# Altium PCB waffling60-SE.PcbDoc (part 1 of 2)
Units mm, origin at the board's own origin, x right, y up, seen from the top; angles counter-clockwise.
Board outline 283.9 x 96.45 mm, 2 copper layers (Component Side, Bottom Layer), stack 1.571 mm thick; 161 components, 102 nets, 768 pads, 77 vias.
Unrouted connection lines stored in the file: 5.
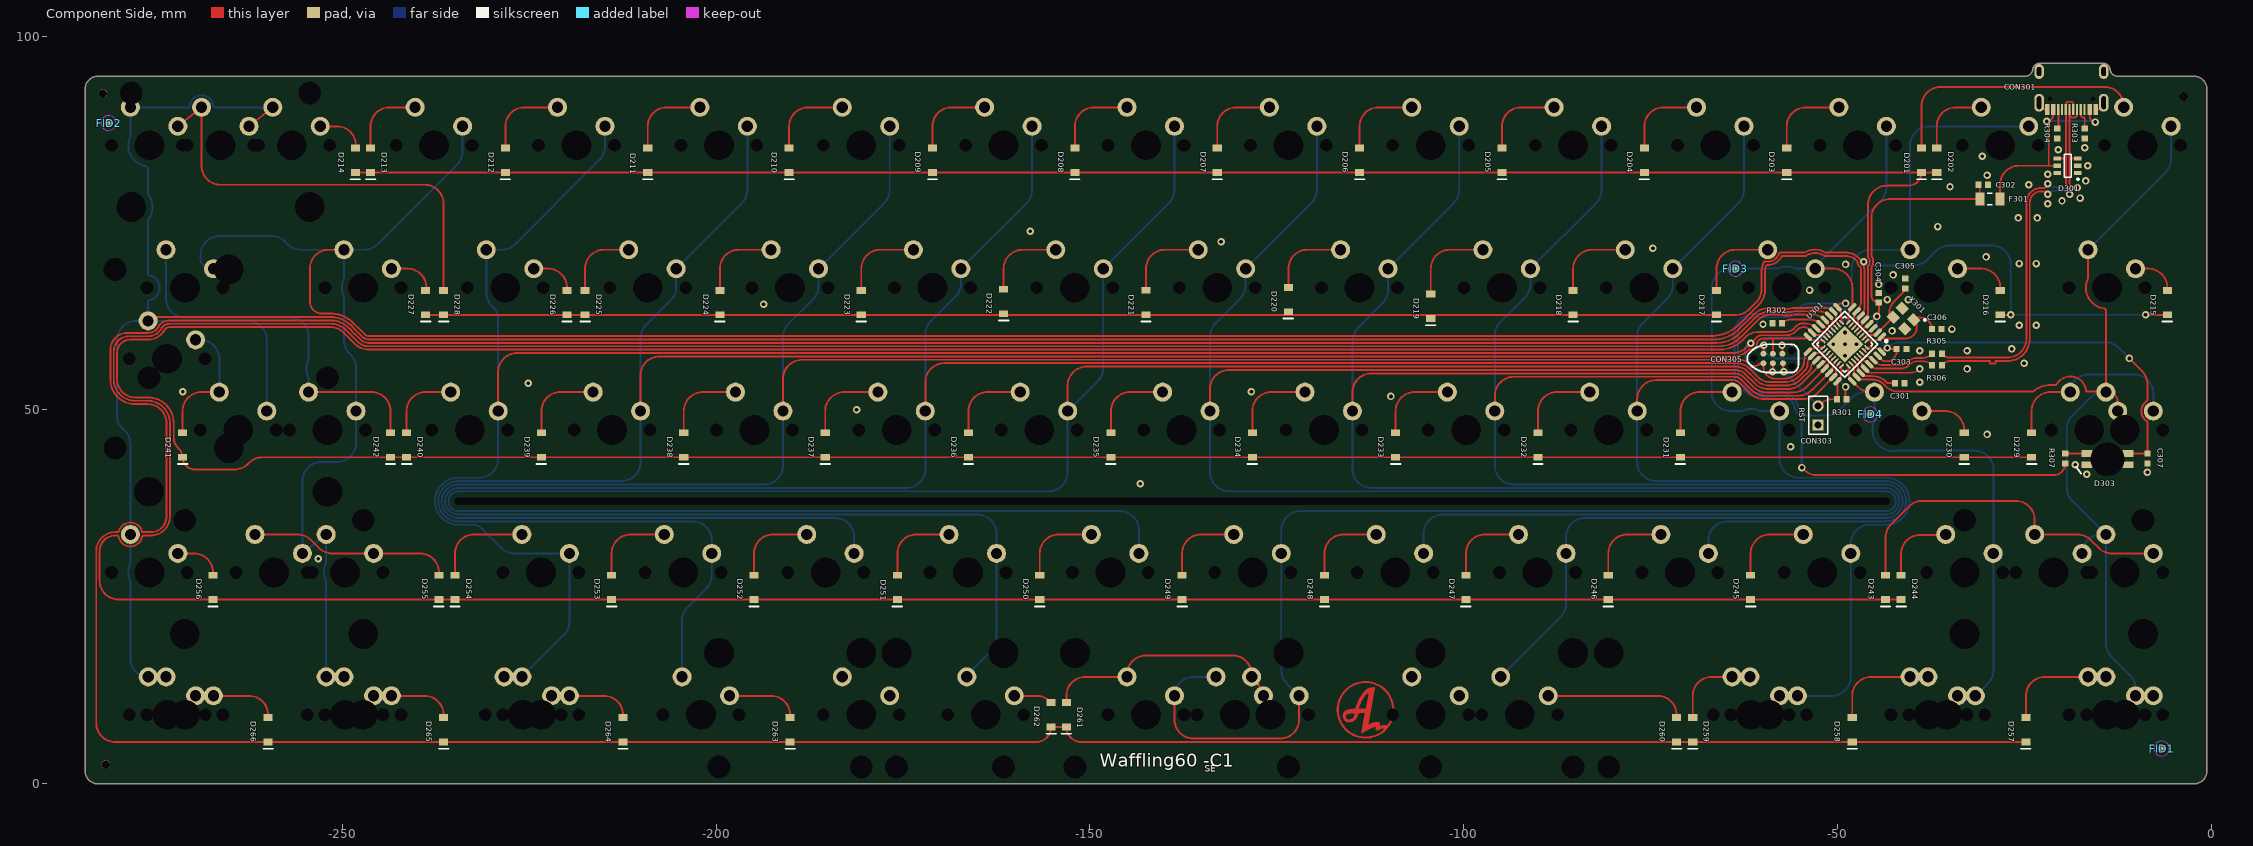
[diagram p0: Component Side view]
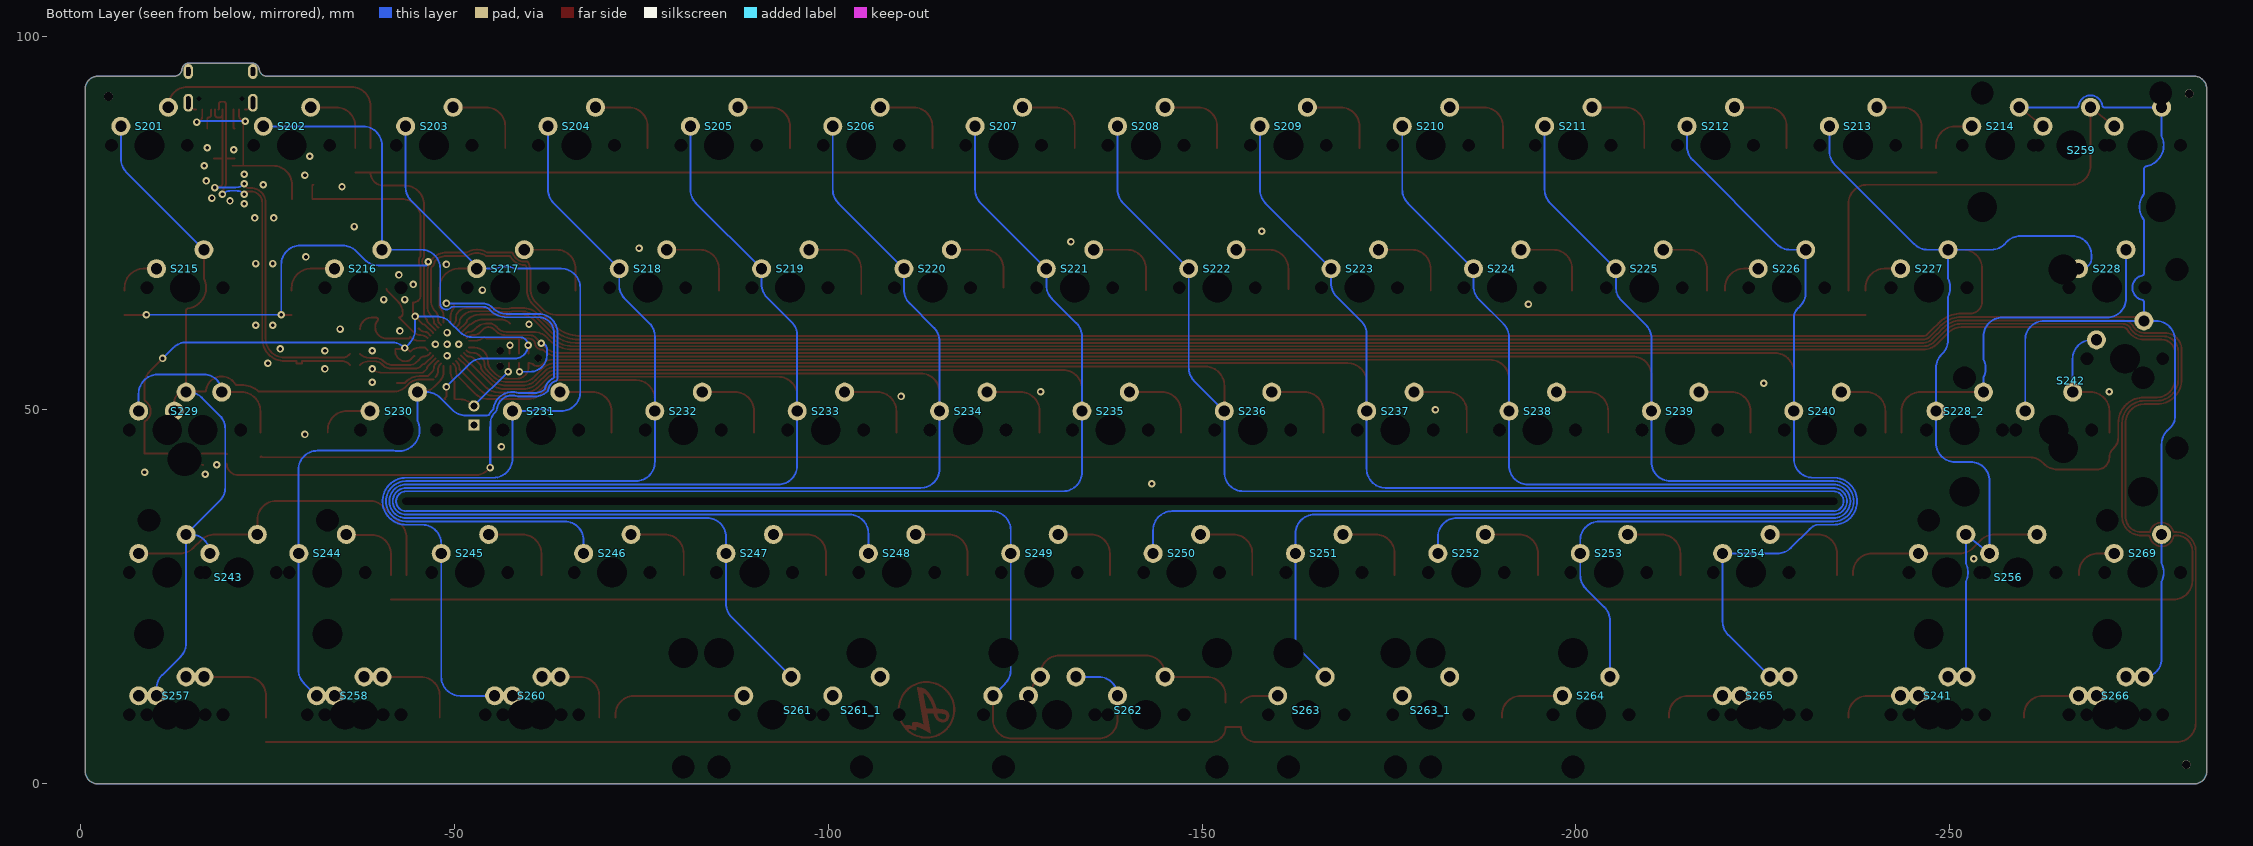
[diagram p1: Bottom Layer view, seen from below]
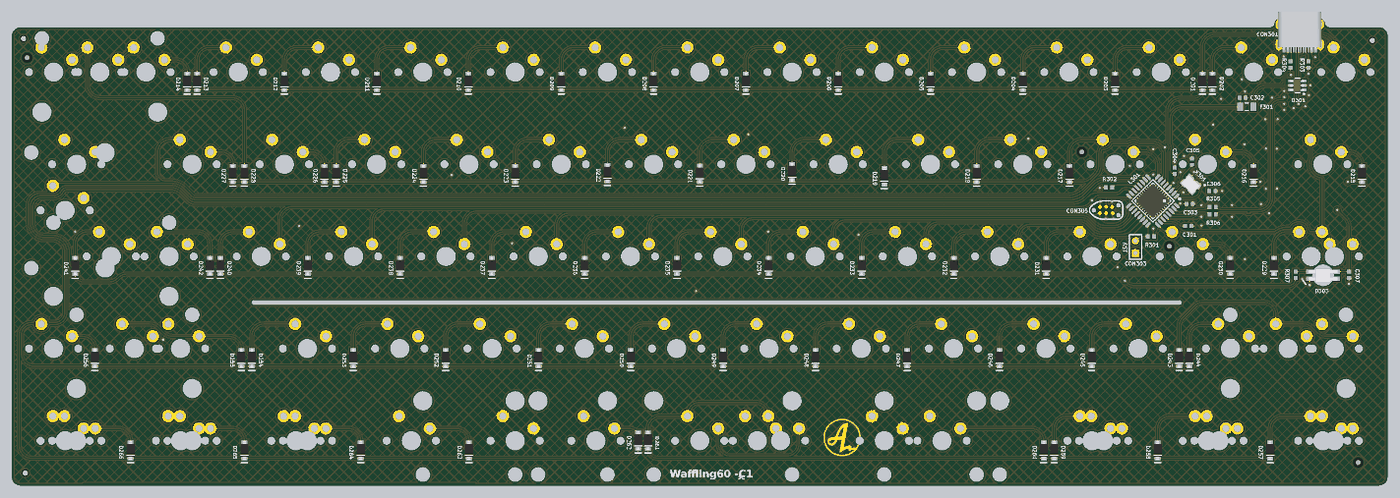
[diagram p3: 3D render of the assembled board from above, using the file's embedded part models]

## Layer stack, top to bottom
Top Solder: solder mask 0.0102, Solder Resist, Dk 3.5
Component Side: signal copper 0.0356
Dielectric 1: core 1.5, FR-4, Dk 4.2
Bottom Layer: signal copper 0.0356
Solder Side: solder mask 0.0102, Solder Resist, Dk 3.5

## Board outline
-284.45,1.715 -284.45,92.915 cw(c-282.7,92.915) -282.7,94.665 -24.85,94.665 ccw(c-24.85,95.665) -23.858,95.54 cw(c-22.866,95.415) -22.866,96.415 -14.484,96.415 cw(c-14.484,95.415) -13.492,95.54 ccw(c-12.5,95.665) -12.5,94.665 -2.3,94.665 cw(c-2.3,92.915) -0.55,92.915 -0.55,1.715 cw(c-2.3,1.715) -2.3,-0.035 -282.7,-0.035 cw(c-282.7,1.715)

## Design rules (kind name [scope] priority, off if disabled: settings)
Clearance [All] p1: gap=0.2 ignorepadtopadclearanceinfootprint=FALSE except(0: Arc-Hole Track-Hole SMDPad-Hole THPad-Hole Via-Hole Fill-Hole Poly-Hole Region-Hole Text-Hole; 0.254: THPad-THPad THPad-Via THPad-Fill THPad-Poly THPad-Region THPad-Text Via-Via Via-Fill Via-Poly Via-Region Via-Text Fill-Fill Fill-Poly Fill-Region Fill-Text Poly-Poly Poly-Region Poly-Text Region-Region Region-Text Text-Text)
ComponentClearance [InComponent('No Component') And OnLayer('Component Side')] p1: gap=0.254 collisioncheckmode=3 verticalgap=0.254 showdistances=FALSE
DiffPairsRouting DiffPairsRouting_USB [InDifferentialPairClass('All Differential Pairs')] p1: maxlimit=0.254 minlimit=0.203 mostfreqgap=0.203 toplayer_minwidth=0.152 toplayer_maxwidth=0.381 toplayer_prefwidth=0.152 bottomlayer_minwidth=0.152 bottomlayer_maxwidth=0.381 bottomlayer_prefwidth=0.152 maxuncoupledlength=12.7
DiffPairsRouting [All] p2: maxlimit=0.254 minlimit=0.254 mostfreqgap=0.254 toplayer_minwidth=0.381 toplayer_maxwidth=0.381 toplayer_prefwidth=0.381 bottomlayer_minwidth=0.381 bottomlayer_maxwidth=0.381 bottomlayer_prefwidth=0.381 maxuncoupledlength=12.7
HoleSize [All] p1: absolutevalues=TRUE maxlimit=20 minlimit=0.025 maxpercent=80.000 minpercent=20.000
MatchedLengths MatchedLengths_USB_DiffPairs_1 [All] p1: tolerance=0.127 checknetsindiffpair=TRUE checkdiffpairvsdiffpair=FALSE checkxsignals=FALSE checkothers=FALSE
MatchedLengths MatchedLengths_USB_DiffPairs [All] p2: tolerance=0.127 checknetsindiffpair=TRUE checkdiffpairvsdiffpair=FALSE checkxsignals=FALSE checkothers=FALSE
PolygonConnect PolygonConnect_1 [All vs IsVia] p1: connectstyle=Direct reliefconductorwidth=0.254 reliefentries=4 polygonreliefangle="90 Angle" airgapwidth=0.254
PolygonConnect [All] p2: connectstyle=Relief reliefconductorwidth=0.254 reliefentries=4 polygonreliefangle="90 Angle" airgapwidth=0.254
RoutingVias [All] p1: holewidth=0.711 width=1.27 viastyle="Through Hole" minholewidth=0.711 minwidth=1.27 maxholewidth=0.711 maxwidth=1.27
SolderMaskExpansion [All] p1: expansion=0.102 istentingtop=FALSE
Width [All] p1: maxlimit=0.508 minlimit=0.203 preferedwidth=0.254 minimp=50.000000 maximp=50.000000 favimp=50.000000
27 further rules are at their usual default settings.

## Classes and differential pairs
component class 1_waffling60-SE_top: FID1 FID2 FID3 FID4
component class Designator: C201 C202 C203 C204 C205 C206 D201 D202 D203 D204 D205 D206 D207 D208 D209 D210 D211 D212 D213 D214 D215 D216 D217 D218 D219 D220 D221 D222 D223 D224 D225 D226 D227 D228 D229 D230 D231 D232 D233 D234 D235 D236 D237 D238 D239 D240 D241 D242 D243 D244 D245 D246 D247 D248 D249 D250 D251 D252 D253 D254 D255 D256 D257 D258 D259 D260 D261 D262 D263 D264 D265 D266 D268 S201 S202 S203 S204 S205 S206 S207 S208 S209 S210 S211 S212 S213 S214 S215 S216 S217 S218 S219 S220 S221 S222 S223 S224 S225 S226 S227 S228 S228_2 S229 S230 S231 S232 S233 S234 S235 S236 S237 S238 S239 S240 S241 S242 S243 S244 S245 S246 S247 S248 S249 S250 S251 S252 S253 S254 S256 S257 S258 S259 S260 S261 S261_1 S262 S263 S263_1 S264 S265 S266 S269
differential pair D_PRE: +D_PRE_P -D_PRE_N
differential pair D: +D_P -D_N

## Components (designator, comment, footprint, x,y, rotation, side; value= is the part's Value field where it differs from the comment)
C301 "" C0603[1608] -41.656,53.594 r180 top value=1uF
C302 "" C0603[1608] -30.48,80.137 r180 top value=4,7uF
C303 "" C0603[1608] -41.402,58.166 r180 top value=0.1uF
C304 "" C0603[1608] -44.45,65.024 r270 top value=0.1uF
C305 "" C0603[1608] -40.894,66.914 r270 top value=15pF
C306 "" C0603[1608] -36.703,60.833 r180 top value=15pF
C307 "" C0603[1608] -8.5,43.5 r90 top value=0.1uF
CON301 "TYPE-C-31-M-12" TYPE-C-31-M-12 -18.675,90.195 r180 top
CON303 "Header 2" HDR1X2 -52.578,48.006 r90 top
CON305 "TC2030-IDC" TC2030-IDC-NL -58.627,56.896 r0 top locked
D201 "Diode" SOD-123 -38.735,83.415 r90 top
D202 "Diode" SOD-123 -36.703,83.415 r90 top
D203 "Diode" SOD-123 -56.769,83.415 r90 top
D204 "Diode" SOD-123 -75.819,83.415 r90 top
D205 "Diode" SOD-123 -94.869,83.415 r90 top
D206 "Diode" SOD-123 -113.919,83.415 r90 top
D207 "Diode" SOD-123 -132.969,83.415 r90 top
D208 "Diode" SOD-123 -152.019,83.415 r90 top
D209 "Diode" SOD-123 -171.069,83.415 r90 top
D210 "Diode" SOD-123 -190.246,83.415 r90 top
D211 "Diode" SOD-123 -209.169,83.415 r90 top
D212 "Diode" SOD-123 -228.219,83.415 r90 top
D213 "Diode" SOD-123 -246.253,83.415 r90 top
D214 "Diode" SOD-123 -248.285,83.415 r90 top
D215 "Diode" SOD-123 -5.842,64.365 r90 top
D216 "Diode" SOD-123 -28.194,64.365 r90 top
D217 "Diode" SOD-123 -66.167,64.365 r90 top
D218 "Diode" SOD-123 -85.344,64.365 r90 top
D219 "Diode" SOD-123 -104.394,63.881 r90 top
D220 "Diode" SOD-123 -123.444,64.77 r90 top
D221 "Diode" SOD-123 -142.494,64.389 r90 top
D222 "Diode" SOD-123 -161.544,64.516 r90 top
D223 "Diode" SOD-123 -180.594,64.365 r90 top
D224 "Diode" SOD-123 -199.517,64.365 r90 top
D225 "Diode" SOD-123 -217.551,64.365 r90 top
D226 "Diode" SOD-123 -219.964,64.365 r90 top
D227 "Diode" SOD-123 -238.887,64.365 r90 top
D228 "Diode" SOD-123 -236.474,64.365 r90 top
D229 "Diode" SOD-123 -24.003,45.315 r90 top
D230 "Diode" SOD-123 -33.02,45.315 r90 top
D231 "Diode" SOD-123 -70.993,45.315 r90 top
D232 "Diode" SOD-123 -90.043,45.315 r90 top
D233 "Diode" SOD-123 -109.093,45.315 r90 top
D234 "Diode" SOD-123 -128.27,45.315 r90 top
D235 "Diode" SOD-123 -147.193,45.315 r90 top
D236 "Diode" SOD-123 -166.243,45.315 r90 top
D237 "Diode" SOD-123 -185.42,45.315 r90 top
D238 "Diode" SOD-123 -204.343,45.315 r90 top
D239 "Diode" SOD-123 -223.393,45.315 r90 top
D240 "Diode" SOD-123 -241.427,45.315 r90 top
D241 "Diode" SOD-123 -271.399,45.315 r90 top
D242 "Diode" SOD-123 -243.586,45.315 r90 top
D243 "Diode" SOD-123 -43.561,26.265 r90 top
D244 "Diode" SOD-123 -41.468,26.265 r90 top
D245 "Diode" SOD-123 -61.595,26.265 r90 top
D246 "Diode" SOD-123 -80.645,26.265 r90 top
D247 "Diode" SOD-123 -99.695,26.265 r90 top
D248 "Diode" SOD-123 -118.618,26.265 r90 top
D249 "Diode" SOD-123 -137.668,26.265 r90 top
D250 "Diode" SOD-123 -156.718,26.265 r90 top
D251 "Diode" SOD-123 -175.768,26.265 r90 top
D252 "Diode" SOD-123 -194.945,26.265 r90 top
D253 "Diode" SOD-123 -213.995,26.265 r90 top
D254 "Diode" SOD-123 -234.95,26.265 r90 top
D255 "Diode" SOD-123 -237.109,26.265 r90 top
D256 "Diode" SOD-123 -267.335,26.265 r90 top
D257 "Diode" SOD-123 -24.765,7.215 r90 top
D258 "Diode" SOD-123 -48.006,7.215 r90 top
D259 "Diode" SOD-123 -69.342,7.215 r90 top
D260 "Diode" SOD-123 -71.501,7.215 r90 top
D261 "Diode" SOD-123 -153.162,9.215 r90 top
D262 "Diode" SOD-123 -155.194,9.215 r90 top
D263 "Diode" SOD-123 -190.119,7.215 r90 top
D264 "Diode" SOD-123 -212.471,7.215 r90 top
D265 "Diode" SOD-123 -236.474,7.215 r90 top
D266 "Diode" SOD-123 -259.969,7.215 r90 top
D301 "SRV05" SOT-23-6 -19.177,82.677 r180 top
D303 "SK6812MINI-E" SK6812MINI-E -13.857,43.422 r0 top
F301 "Fuse Thermal" C1206[3216] -29.591,78.232 r0 top
FID1 "Plug" Fiducial_Nordic -6.604,4.699 r90 top
FID2 "Plug" Fiducial_Nordic -281.305,88.392 r90 top
FID3 "Plug" Fiducial_Nordic -63.627,68.905 r90 top
FID4 "Plug" Fiducial_Nordic -45.593,49.403 r90 top
R301 "Res1" R0603[1608] -49.403,51.435 r180 top value=10K
R302 "Res1" R0603[1608] -58.039,61.595 r180 top value=10K
R303 "Res1" R0603[1608] -16.891,86.995 r270 top value=5k1
R304 "Res1" R0603[1608] -20.574,86.995 r270 top value=5k1
R305 "Res1" R0603[1608] -36.651,57.531 r0 top value=22
R306 "Res1" R0603[1608] -36.651,56.007 r0 top value=22
R307 "Res1" R0603[1608] -19.5,43.5 r270 top value=470
S201 "MX" "MX-SWITCH - SWITCHED POL" -9.15,85.415 r180 bottom locked
S202 "MX" "MX-SWITCH - SWITCHED POL - CONNECTOR" -28.2,85.415 r180 bottom locked
S203 "MX" "MX-switch - switched pol" -47.25,85.415 r180 bottom locked
S204 "MX" "MX-switch - switched pol" -66.3,85.415 r180 bottom locked
S205 "MX" "MX-switch - switched pol" -85.35,85.415 r180 bottom locked
S206 "MX" "MX-switch - switched pol" -104.4,85.415 r180 bottom locked
S207 "MX" "MX-switch - switched pol" -123.45,85.415 r180 bottom locked
S208 "MX" "MX-switch - switched pol" -142.5,85.415 r180 bottom locked
S209 "MX" "MX-switch - switched pol" -161.55,85.415 r180 bottom locked
S210 "MX" "MX-switch - switched pol" -180.6,85.415 r180 bottom locked
S211 "MX" "MX-switch - switched pol" -199.65,85.415 r180 bottom locked
S212 "MX" "MX-switch - switched pol" -218.7,85.415 r180 bottom locked
S213 "MX" "MX-switch - switched pol" -237.75,85.415 r180 bottom locked
S214 "MX" MX-SWITCH -256.8,85.415 r180 bottom locked
S215 "MX" MX-switch -13.912,66.365 r180 bottom locked
S216 "MX" MX-switch -37.725,66.365 r180 bottom locked
S217 "MX" "MX-switch - switched pol" -56.775,66.365 r180 bottom locked
S218 "MX" "MX-switch - switched pol" -75.825,66.365 r180 bottom locked
S219 "MX" "MX-switch - switched pol" -94.875,66.365 r180 bottom locked
S220 "MX" "MX-switch - switched pol" -113.925,66.365 r180 bottom locked
S221 "MX" "MX-switch - switched pol" -132.975,66.365 r180 bottom locked
S222 "MX" "MX-switch - switched pol" -152.025,66.365 r180 bottom locked
S223 "MX" "MX-switch - switched pol" -171.075,66.365 r180 bottom locked
S224 "MX" "MX-switch - switched pol" -190.125,66.365 r180 bottom locked
S225 "MX" "MX-switch - switched pol" -209.175,66.365 r180 bottom locked
S226 "MX" MX-switch -228.225,66.365 r180 bottom locked
S227 "MX" MX-switch -247.275,66.365 r180 bottom locked
S228 "MX" "MX-switch - 1.5U - switched pol" -271.087,66.365 r180 bottom locked
S228_2 "MX" "MX-switch - switched pol" -252.012,47.315 r180 bottom
S229 "MX" "MX-SWITCH - CAPS" -16.294,47.315 r180 bottom locked
S230 "MX" MX-switch -42.487,47.315 r180 bottom locked
S231 "MX" "MX-switch - switched pol" -61.537,47.315 r180 bottom locked
S232 "MX" "MX-switch - switched pol" -80.587,47.315 r180 bottom locked
S233 "MX" "MX-switch - switched pol" -99.637,47.315 r180 bottom locked
S234 "MX" "MX-switch - switched pol" -118.687,47.315 r180 bottom
S235 "MX" "MX-SWITCH - SWITCHED POL" -137.737,47.315 r180 bottom locked
S236 "MX" "MX-SWITCH - SWITCHED POL" -156.787,47.315 r180 bottom locked
S237 "MX" "MX-switch - switched pol" -175.837,47.315 r180 bottom locked
S238 "MX" "MX-switch - switched pol" -194.887,47.315 r180 bottom locked
S239 "MX" "MX-switch - switched pol" -213.937,47.315 r180 bottom locked
S240 "MX" "MX-switch - switched pol" -232.987,47.315 r180 bottom locked
S241 "MX" "MX-SWITCH - 1U MOD-R" -247.274,9.215 r180 bottom locked
S242 "MX" "MX-switch - Enter - Rotated Stab" -263.95,47.315 r180 bottom
S243 "MX" "MX-SWITCH - LEFT SHIFT" -21.056,28.265 r180 bottom
S244 "MX" MX-switch -32.96,28.265 r180 bottom
S245 "MX" "MX-switch - switched pol" -52.012,28.265 r180 bottom locked
S246 "MX" "MX-switch - switched pol" -71.062,28.265 r180 bottom locked
S247 "MX" "MX-switch - switched pol" -90.112,28.265 r180 bottom locked
S248 "MX" "MX-switch - switched pol" -109.162,28.265 r180 bottom locked
S249 "MX" "MX-switch - switched pol" -128.212,28.265 r180 bottom locked
S250 "MX" "MX-switch - switched pol" -147.262,28.265 r180 bottom locked
S251 "MX" "MX-switch - switched pol" -166.312,28.265 r180 bottom locked
S252 "MX" "MX-switch - switched pol" -185.362,28.265 r180 bottom locked
S253 "MX" "MX-switch - switched pol" -204.412,28.265 r180 bottom locked
S254 "MX" "MX-switch - switched pol" -223.462,28.265 r180 bottom locked
S256 "MX" "MX-SWITCH - RIGHT SHIFT" -259.18,28.265 r180 bottom locked
S257 "MX" "MX-SWITCH - 1.5U MOD-L" -13.912,9.215 r180 bottom locked
S258 "MX" "MX-SWITCH - 1U MOD-L" -37.724,9.215 r180 bottom locked
S259 "MX" "MX-switch - backspace" -266.325,85.415 r180 bottom locked
S260 "MX" "MX-SWITCH - 1.5U MOD-L" -61.537,9.215 r180 bottom locked
S261 "MX" "MX-SWITCH - L SPLIT SPACE_V2" -102.018,9.215 r0 bottom locked
S261_1 "MX" "MX-switch - 3U - rotated stab" -104.399,9.215 r180 bottom locked
S262 "MX" "MX-SWITCH - SPACE_V3" -142.499,9.215 r180 bottom locked
S263 "MX" "MX-SWITCH - R SPLIT SPACE_V2" -163.931,9.215 r0 bottom locked
S263_1 "MX" "MX-switch - 3U - rotated stab" -180.599,9.215 r180 bottom locked
S264 "MX" MX-switch -202.031,9.215 r180 bottom locked
S265 "MX" "MX-SWITCH - 1.5U MOD-R" -223.462,9.215 r180 bottom locked
S266 "MX" "MX-SWITCH - 1.5U MOD-R" -271.087,9.215 r180 bottom locked
S269 "MX" MX-SWITCH -275.85,28.265 r180 bottom locked
U301 "ATMEGA32U2" ATMEGA32U2-COMBO -48.984,58.798 r225 top locked
X301 "XTAL" XTAL-3225 -41.148,62.23 r135 top

## Footprints (in the part's own frame and the unit in brackets; to place one, negate y for a bottom-side part, rotate by r counter-clockwise, add the part's x,y. Pads: shape width x height; smd on the part's side, far side on the other; paste and mask are expansions set on the pad)
ATMEGA32U2-COMBO [mm]
  oval 1.4x0.55 smd: 1(-4.2,2.8) 2(-4.2,2) 3(-4.2,1.2) 4(-4.2,0.4) 5(-4.2,-0.4) 6(-4.2,-1.2) 7(-4.2,-2) 8(-4.2,-2.8) 17(4.2,-2.8) 18(4.2,-2) 19(4.2,-1.2) 20(4.2,-0.4) 21(4.2,0.4) 22(4.2,1.2) 23(4.2,2) 24(4.2,2.8)
  oval 0.85x0.25 smd: 1(-2.4,1.75) 2(-2.4,1.25) 3(-2.4,0.75) 4(-2.4,0.25) 5(-2.4,-0.25) 6(-2.4,-0.75) 7(-2.4,-1.25) 8(-2.4,-1.75) 17(2.4,-1.75) 18(2.4,-1.25) 19(2.4,-0.75) 20(2.4,-0.25) 21(2.4,0.25) 22(2.4,0.75) 23(2.4,1.25) 24(2.4,1.75)
  oval 0.55x1.4 smd: 9(-2.8,-4.2) 10(-2,-4.2) 11(-1.2,-4.2) 12(-0.4,-4.2) 13(0.4,-4.2) 14(1.2,-4.2) 15(2,-4.2) 16(2.8,-4.2) 25(2.8,4.2) 26(2,4.2) 27(1.2,4.2) 28(0.4,4.2) 29(-0.4,4.2) 30(-1.2,4.2) 31(-2,4.2) 32(-2.8,4.2)
  oval 0.25x0.85 smd: 9(-1.75,-2.4) 10(-1.25,-2.4) 11(-0.75,-2.4) 12(-0.25,-2.4) 13(0.25,-2.4) 14(0.75,-2.4) 15(1.25,-2.4) 16(1.75,-2.4) 25(1.75,2.4) 26(1.25,2.4) 27(0.75,2.4) 28(0.25,2.4) 29(-0.25,2.4) 30(-0.75,2.4) 31(-1.25,2.4) 32(-1.75,2.4)
  rect 3.5x3.5 smd: 28(0,0)
  silkscreen extent -4.32,-3.1 3.1,3.75, body extent -2.51,-2.51 2.51,2.51, height 1
C0603[1608] [mm] "Chip Resistor, 2-Leads, Body 1,57x0,80mm, IPC Medium Density"
  rect 0.8x0.85 smd: 1(-0.65,0) 2(0.65,0)
  body extent -0.83,-0.43 0.82,0.43, height 0.5
C1206[3216] [mm]
  rect 1.2x1.8 smd: 1(-1.35,0) 2(1.35,0)
  silkscreen extent -0.35,-0.8 0.35,0.8, body extent -1.6,-0.9 1.6,0.9, height 1.2
Fiducial_Nordic [mm]
  round 1 smd paste+0 mask+0.5: 0(0,0)
  Component Side keep-out circle w0.01: c0,0 r1
HDR1X2 [mm] "Connector; Header; 2 Position"
  rect 1.5x1.5 hole 0.9 mask+0.102: 1(0,0)
  round 1.5 hole 0.9 mask+0.102: 2(2.54,0)
  silkscreen extent -1.27,-1.27 3.81,1.27
MX-SWITCH [mm]
  round 2.54 hole 1.499 mask+0.102: 1(-3.81,2.54) 2(2.54,5.08)
  round 1 hole 1.702 unplated: ""(-5.08,0) ""(5.08,0)
  round 1 hole 3.988 unplated: ""(0,0)
MX-switch [mm]
  round 2.54 hole 1.499 mask+0.102: 1(-3.81,2.54) 2(2.54,5.08)
  round 1 hole 1.702 unplated: ""(-5.08,0) ""(5.08,0)
  round 1 hole 3.988 unplated: ""(0,0)
"MX-switch - 1.5U - switched pol" [mm]
  round 2.54 hole 1.499 mask+0.102: 1(2.54,5.08) 2(-3.81,2.54)
  round 1 hole 1.702 unplated: ""(-5.08,0) ""(5.08,0)
  round 1 hole 3.988 unplated: ""(0,0)
  round 1 on Mech14: ""(0,0)
"MX-SWITCH - 1.5U MOD-L" [mm]
  round 2.54 hole 1.499 mask+0.102: 1(-6.191,2.54) 1(-3.81,2.54) 2(0.159,5.08) 2(2.54,5.08)
  round 1 hole 1.702 unplated: ""(-7.461,0) ""(-5.08,0) ""(2.699,0) ""(5.08,0)
  round 1 on Mech14: ""(-4.763,0) ""(-2.381,0) ""(0,0) ""(4.763,0)
  round 1 hole 3.988 unplated: ""(-2.381,0) ""(0,0)
"MX-SWITCH - 1.5U MOD-R" [mm]
  round 2.54 hole 1.499 mask+0.102: 1(-3.81,2.54) 1(-1.429,2.54) 2(2.54,5.08) 2(4.921,5.08)
  round 1 hole 1.702 unplated: ""(-5.08,0) ""(-2.699,0) ""(5.08,0) ""(7.461,0)
  round 1 on Mech14: ""(-2.381,0) ""(0,0) ""(2.381,0) ""(4.763,0)
  round 1 hole 3.988 unplated: ""(0,0) ""(2.381,0)
"MX-SWITCH - 1U MOD-L" [mm]
  round 2.54 hole 1.499 mask+0.102: 1(-6.191,2.54) 1(-3.81,2.54) 2(0.159,5.08) 2(2.54,5.08)
  round 1 hole 1.702 unplated: ""(-7.461,0) ""(-5.08,0) ""(2.699,0) ""(5.08,0)
  round 1 hole 3.988 unplated: ""(-2.381,0) ""(0,0)
  round 1 on Mech14: ""(-2.381,0) ""(0,0) ""(2.381,0)
"MX-SWITCH - 1U MOD-R" [mm]
  round 2.54 hole 1.499 mask+0.102: 1(-3.81,2.54) 1(-1.429,2.54) 2(2.54,5.08) 2(4.921,5.08)
  round 1 hole 1.702 unplated: ""(-5.08,0) ""(-2.699,0) ""(5.08,0) ""(7.461,0)
  round 1 on Mech14: ""(-4.763,0) ""(-2.381,0) ""(0,0) ""(2.381,0)
  round 1 hole 3.988 unplated: ""(0,0) ""(2.381,0)
"MX-switch - 3U - rotated stab" [mil]
  round 100 hole 59 mask+4: 1(-150,100) 2(100,200)
  round 60 hole 120 unplated: ""(-750,-275) ""(750,-275)
  round 60 hole 157.01 unplated: ""(-750,325) ""(750,325)
  round 39.37 hole 67.01 unplated: ""(-200,0) ""(200,0)
  round 39.37 hole 157.01 unplated: ""(0,0)
  round 39.37 on Mech14: ""(0,0)
"MX-switch - backspace" [mil]
  round 100 hole 59 mask+4: 1(100,200) 1(225,100) 2(-150,100) 2(475,200)
  round 60 hole 157.01 unplated: ""(-470,-325) ""(470,-325)
  round 60 hole 120 unplated: ""(-470,275) ""(470,275)
  round 39.37 hole 67.01 unplated: ""(-200,0) ""(175,0) ""(200,0) ""(575,0)
  round 39.37 hole 157.01 unplated: ""(0,0) ""(375,0)
  round 39.37 on Mech14: ""(0,0) ""(375,0)
"MX-SWITCH - CAPS" [mm]
  round 2.54 hole 1.499 mask+0.102: 1(-8.572,2.54) 1(2.54,5.08) 2(-3.81,2.54) 2(-2.222,5.08)
  round 1 hole 1.702 unplated: ""(-9.842,0) ""(5.08,0)
  round 1 hole 3.988 unplated: ""(-4.763,0) ""(0,0)
  round 1 on Mech14: ""(-4.763,0) ""(0,0)
"MX-switch - Enter - Rotated Stab" [mm]
  round 2.54 hole 1.499 mask+0.102: 1(2.54,5.08) 1(5.72,12.07) 2(-3.81,2.54) 2(12.07,14.61)
  round 1.524 hole 3.988 unplated: ""(-11.938,-8.255) ""(1.275,-2.408) ""(1.275,21.468) ""(11.938,-8.255)
  round 1.524 hole 3.048 unplated: ""(-11.938,6.985) ""(11.938,6.985) ""(16.515,-2.408) ""(16.515,21.468)
  round 1 hole 1.702 unplated: ""(-5.08,0) ""(4.45,9.53) ""(5.08,0) ""(14.61,9.53)
  round 1 hole 3.988 unplated: ""(0,0) ""(9.53,9.53)
  round 1 on Mech14: ""(0,0) ""(9.53,9.53)
"MX-SWITCH - L SPLIT SPACE_V2" [mil]
  round 100 hole 59 mask+4: 1(525,-100) 2(275,-200)
  round 60 hole 157.01 unplated: ""(-95,-325)
  round 60 hole 120 unplated: ""(-95,275)
  round 39.37 hole 67.01 unplated: ""(175,0) ""(575,0)
  round 39.37 hole 157.01 unplated: ""(375,0)
  round 39.37 on Mech14: ""(375,0)
"MX-SWITCH - LEFT SHIFT" [mil]
  round 100 hole 59 mask+4: 1(-525,100) 1(100,200) 2(-275,200) 2(-150,100)
  round 39.37 hole 67.01 unplated: ""(-575,0) ""(-200,0) ""(-175,0) ""(200,0)
  round 60 hole 157.01 unplated: ""(-470,-325) ""(470,-325)
  round 60 hole 120 unplated: ""(-470,275) ""(470,275)
  round 39.37 hole 157.01 unplated: ""(-375,0) ""(0,0)
  round 39.37 on Mech14: ""(-375,0) ""(0,0)
"MX-SWITCH - R SPLIT SPACE_V2" [mil]
  round 100 hole 59 mask+4: 1(150,-100) 2(-100,-200)
  round 60 hole 157.01 unplated: ""(-470,-325) ""(470,-325)
  round 60 hole 120 unplated: ""(-470,275) ""(470,275)
  round 39.37 hole 67.01 unplated: ""(-200,0) ""(200,0)
  round 39.37 hole 157.01 unplated: ""(0,0)
  round 39.37 on Mech14: ""(0,0)
"MX-SWITCH - RIGHT SHIFT" [mil]
  round 100 hole 59 mask+4: 1(-525,100) 1(100,200) 2(-275,200) 2(-150,100)
  round 39.37 hole 67.01 unplated: ""(-575,0) ""(-200,0) ""(-175,0) ""(200,0)
  round 60 hole 157.01 unplated: ""(-470,-325) ""(470,-325)
  round 60 hole 120 unplated: ""(-470,275) ""(470,275)
  round 39.37 hole 157.01 unplated: ""(-375,0) ""(0,0)
  round 39.37 on Mech14: ""(-375,0) ""(0,0)
"MX-SWITCH - SPACE_V3" [mil]
  round 100 hole 59 mask+4: 1(-806.55,100) 1(-368.75,200) 1(-150,100) 2(-618.75,100) 2(-556.55,200) 2(100,200)
  round 60 hole 120 unplated: ""(-2437.4,-275) ""(-2250,-275) ""(1499.61,-275) ""(2250,-275)
  round 60 hole 157.01 unplated: ""(-2437.4,325) ""(-2250,325) ""(1499.61,325) ""(2250,325)
  round 39.37 hole 67.01 unplated: ""(-856.55,0) ""(-268.75,0) ""(-200,0) ""(200,0)
  round 39.37 hole 157.01 unplated: ""(-656.55,0) ""(-468.75,0) ""(0,0)
  round 39.37 on Mech14: ""(-656.55,0) ""(-468.75,0) ""(0,0)
"MX-SWITCH - SWITCHED POL" [mm]
  round 2.54 hole 1.499 mask+0.102: 1(2.54,5.08) 2(-3.81,2.54)
  round 1 hole 1.702 unplated: ""(-5.08,0) ""(5.08,0)
  round 1 hole 3.988 unplated: ""(0,0)
"MX-switch - switched pol" [mm]
  round 2.54 hole 1.499 mask+0.102: 1(2.54,5.08) 2(-3.81,2.54)
  round 1 hole 1.702 unplated: ""(-5.08,0) ""(5.08,0)
  round 1 hole 3.988 unplated: ""(0,0)
"MX-SWITCH - SWITCHED POL - CONNECTOR" [mm]
  round 2.54 hole 1.499 mask+0.102: 1(2.54,5.08) 2(-3.81,2.54)
  round 1 hole 1.702 unplated: ""(-5.08,0) ""(5.08,0)
  round 1 hole 3.988 unplated: ""(0,0)
R0603[1608] [mm] "Chip Resistor, 2-Leads, Body 1,57x0,80mm, IPC Medium Density"
  rect 0.8x0.85 smd: 1(-0.65,0) 2(0.65,0)
  body extent -0.83,-0.43 0.82,0.43, height 0.5
SK6812MINI-E [mm]
  rect 1.5x0.9 smd: 1(2.75,0.75) 2(2.75,-0.75) 3(-2.75,-0.75) 4(-2.75,0.75)
  round 1 hole 4.5 unplated: ""(0,0)
  silkscreen extent -4.19,-1.91 -3.56,-1.02, body extent -2.94,-1.4 2.94,1.4, height 0.94
SOD-123 [mm]
  rect 0.91x1.22 smd: 1(1.635,0) 2(-1.635,0)
  silkscreen extent -2.54,-0.64 -2.54,0.63, body extent -1.87,-0.85 1.88,0.85, height 1.2
SOT-23-6 [mm]
  rect 1x0.55 smd: 1(-1.375,0.95) 2(-1.375,0) 3(-1.375,-0.95) 4(1.375,-0.95) 5(1.375,0) 6(1.375,0.95)
  silkscreen extent -1.5,-1.55 0.46,1.92, body extent -1.37,-1.44 1.47,1.49, height 1.05
TC2030-IDC-NL [mm] "Tag-Connect 6-Pin with No Legs (PN# TC2030-IDC-NL)"
  round 0.9 hole 0.995 unplated: 0(-2.54,0) 0(2.54,-1.016) 0(2.54,1.016)
  round 0.79 smd paste-0.39: 1(-1.27,-0.635) 2(-1.27,0.635) 3(0,-0.635) 4(0,0.635) 5(1.35,-0.635) 6(1.27,0.635)
  silkscreen extent -3.43,-1.91 3.43,1.9
TYPE-C-31-M-12 [mm]
  rect 0.6x1.45 smd: A1B12(-3.25,0) A4B9(-2.45,0) B1A12(3.25,0) B4A9(2.45,0)
  rect 0.3x1.45 smd: A5(-1.25,0) A6(-0.25,0) A7(0.25,0) A8(1.25,0) B5(1.75,0) B6(0.75,0) B7(-0.75,0) B8(-1.75,0)
  oval 1.3x2.4 hole 0.6 slot 1.7 at 90 deg: S1(-4.32,-0.915) S1(4.32,-0.915)
  oval 1.3x2 hole 0.6 slot 1.2 at 90 deg: S1(-4.32,-5.095) S1(4.32,-5.095)
  round 0 hole 0.65 unplated: ""(-2.89,-1.445) ""(2.89,-1.445)
  body extent -4.47,-7.72 4.47,0.18, height 3.21
XTAL-3225 [mm]
  rect 1.4x1.2 smd: 1(-1.1,-0.85) 2(1.1,-0.85) 3(1.1,0.85) 4(-1.1,0.85)
  silkscreen extent -2.28,-2.03 -2.03,-1.78, body extent -1.6,-1.25 1.6,1.25, height 0.65

## Part data
C301: library part Cap, "Capacitor", LCSC MFG="Samsung Electro-Mechanics", LCSC Part #=C15849, MFG=KEMET, MFGPN=C0603C104M5RACTU, MRF.Part=CL10A105KB8NNNC, Version="0603 imperial"
C302: library part Cap, "Capacitor", LCSC MFG="Samsung Electro-Mechanics", LCSC Part #=C19666, MRF.Part=CL10A475KO8NNNC
C303 C304 C307: library part Cap, "Capacitor", LCSC MFG=YAGEO, LCSC Part #=C14663, MFG=KEMET, MFGPN=C0603C104M5RACTU, MRF.Part=CC0603KRX7R9BB104, Version="0603 imperial"
C305 C306: library part Cap, "Capacitor", LCSC MFG="Samsung Electro-Mechanics", LCSC Part #=C1644, MRF.Part=CL10C150JB8NNNC, Version="0603 imperial"
CON301: LCSC MFG="Korean Hroparts Elec", LCSC Part #=C165948, MFG="Korean Hroparts Elec", MFGPN=TYPE-C-31-M-12, MRF.Part=TYPE-C-31-M-12
CON303: "Header, 2-Pin"
CON305: library part "Header 3X2", "TagConnect header"
D201 D202 D203 D204 D205 D206 D207 D208 D209 D210 D211 D212 D213 D214 D215 D216 D217 D218 D219 D220 D221 D222 D223 D224 D225 D226 D227 D228 D229 D230 D231 D232 D233 D234 D235 D236 D237 D238 D239 D240 D241 D242 D243 D244 D245 D246 D247 D248 D249 D250 D251 D252 D253 D254 D255 D256 D257 D258 D259 D260 D261 D262 D263 D264 D265 D266: "Default Diode", LCSC MFG=ST(Semtech), LCSC Part #=C81598, MRF.Part=1N4148W, Version=SOD-123
D301: LCSC MFG="ProTek Devices", LCSC Part #=C85364, MRF.Part=SRV05-4-P-T7
D303: LCSC MFG=TONYU, LCSC Part #=C524051, MRF.Part=DY-S352818/RGBC/6812-2T
F301: "Thermal Fuse", LCSC MFG="Shenzhen JDT Fuse", LCSC Part #=C135338, MFG="Bel Fuse Inc.", MFGPN=0ZCJ0050FF2G, MRF.Part=ASMD1206-050
R301 R302: "Resistor", LCSC MFG="Uniroyal Elec", LCSC Part #=C25804, MFG="Panasonic Electronic Components", MFGPN=ERJ-3EKF5101V, MRF.Part=0603WAF1002T5E, Version="0603 imperial"
R303 R304: "Resistor", LCSC MFG="Uniroyal Elec", LCSC Part #=C23186, MFG="Panasonic Electronic Components", MFGPN=ERJ-3EKF5101V, MRF.Part=0603WAF5101T5E, Version="0603 imperial"
R305 R306: "Resistor", LCSC MFG="Uniroyal Elec", LCSC Part #=C23345, MFG="Panasonic Electronic Components", MFGPN=ERJ-3EKF5101V, MRF.Part=0603WAF220JT5E, Version="0603 imperial"
R307: "Resistor", LCSC MFG="UNI-ROYAL(Uniroyal Elec)", LCSC Part #=C23179, MFG="Panasonic Electronic Components", MFGPN=ERJ-3EKF5101V, MRF.Part=0603WAF4700T5E, Version="0603 imperial"
S201 S202 S203 S204 S205 S206 S207 S208 S209 S210 S211 S212 S213 S214 S216 S217 S218 S219 S220 S221 S222 S223 S224 S225 S226 S227 S228 S228_2 S229 S230 S231 S232 S233 S234 S235 S236 S237 S238 S239 S240 S241 S242 S243 S244 S245 S246 S247 S248 S249 S250 S251 S252 S253 S254 S256 S257 S258 S259 S260 S261 S261_1 S262 S263 S263_1 S264 S265 S266 S269: library part SW-PB, "Switch"
S215: library part SW-PB, "TAB"
U301: LCSC MFG="Microchip Tech", LCSC Part #=C57345, MFG="Microchip Technology", MFGPN=ATMEGA32U2-AUR, MRF.Part=ATMEGA32U2-MU
X301: "Crystal Oscillator", LCSC MFG="Yangxing Tech", LCSC Part #=C13738, MRF.Part=X322516MLB4SI

## Free pads (board coordinates)
  round 1.152 hole 1.152 unplated paste+0.148 mask+0.148: ""(-282.067,92.329) ""(-281.686,2.54) ""(-3.683,91.948)
  round 0 hole 1 slot 192 at 0 deg unplated: ""(-139,37.79)

## Via types
v1: diameter 1, hole 0.5, Component Side to Bottom Layer, tented both sides, 72 vias
v2: diameter 1, hole 0.5, Component Side to Bottom Layer, tented bottom, 5 vias

## Nets (pads, with @x,y where several pads share a name; then routed paths per layer and width w, separated by ;. In a path a pad name is that pad's centre, name@x,y a point inside that pad or via, vN(x,y) a via of type N, cw(c..) or ccw(c..) an arc to the next point about the centre after c; other vN are vias at no path point)
col1: S201.2 S215.2 S229.2 S243.2 S257.1 U301.26 | length 135.9
  Component Side w0.254: U301.26@-48.171,56.217 -48.076,56.122 cw(c-48.825,55.372) -47.765,55.372 -47.765,55.227 ccw(c-46.615,55.227) U301.26@-47.428,54.414 ; U301.26@-47.148,54.077 -45.287,54.077 cw(c-45.287,51.995) -43.816,53.468 ; -43.815,53.467 -43.543,53.195 ccw(c-41.747,54.991) -41.747,52.451 -26.67,52.451 -23.905,52.451 ccw(c-23.905,52.705) -23.739,52.512 cw(c-21.463,49.855) -21.463,53.354 -20.853,53.354 ccw(c-20.853,53.608) -20.636,53.477 cw(c-18.834,52.395) -16.75,52.672 ccw(c-16.498,52.705) -16.498,52.451 -14.789,52.451 -14.206,52.451 cw(c-14.206,52.26) S229.2@-14.071,52.395 S229.2@-14.071,52.579 ; -16.63,65.589 cw(c-13.912,66.365) -16.476,67.554 ; S215.2@-16.452,71.445 -16.452,67.662 cw(c-16.706,67.661) -16.475,67.555 cw(c-16.706,67.661) -16.476,67.554 ; S229.2@-12.484,49.855 -12.484,50.984 ccw(c-14.079,50.984) S229.2@-14.071,52.579 ; -16.476,67.554 ccw(c-13.912,66.365) -14.291,63.565 cw(c-14.325,63.313) -14.071,63.312 S229.2@-14.071,52.579
  Bottom Layer w0.254: S243.2@-17.246,30.805 cw(c-14.706,30.805) -14.706,33.345 S243.2@-14.071,33.345 ; S215.2@-16.452,71.445 -6.084,81.814 ccw(c-7.88,83.61) -5.34,83.61 S201.2@-5.34,87.955 ; S229.2@-14.071,52.395 -14.371,52.395 ccw(c-14.371,49.855) -16.167,51.651 -18.56,49.258 ccw(c-16.764,47.462) -19.304,47.462 -19.304,39.63 ccw(c-16.764,39.63) -18.56,37.834 S243.2@-14.071,33.345 ; S257.1@-10.102,11.755 -10.102,12.733 ccw(c-12.642,12.733) -10.846,14.529 -13.327,17.01 cw(c-11.531,18.806) -14.071,18.806 S243.2@-14.071,33.345
col2: S202.2 S216.2 S230.2 S244.1 S258.1 U301.25 | length 152.2
  Component Side w0.254: U301.25@-48.524,55.863 -48.524,55.128 ccw(c-46.714,55.128) U301.25@-47.994,53.848 -47.285,53.139 ccw(c-45.489,54.935) -45.489,52.395 S230.2@-45.027,52.395
  Bottom Layer w0.254: -62.353,53.506 ccw(c-64.077,52.395) -62.691,53.906 ; -56.776,52.227 cw(c-56.874,51.784) -56.623,52.162 ccw(c-56.483,52.374) -56.596,52.146 cw(c-57.727,49.855) -55.719,51.435 ; -56.754,52.224 cw(c-56.71,52.474) -56.802,52.237 ccw(c-57.727,49.855) -58.526,52.283 cw(c-58.606,52.524) -58.606,52.27 -60.706,52.27 cw(c-60.706,54.356) -61.988,52.71 cw(c-61.831,52.91) -62.078,52.853 ccw(c-64.077,52.395) -62.476,53.677 ccw(c-64.077,52.395) -62.691,53.906 ; -55.719,51.435 cw(c-57.727,49.855) -55.359,50.815 cw(c-57.727,49.855) -55.358,50.814 cw(c-57.727,49.855) -55.219,50.347 cw(c-57.727,49.855) -55.206,50.274 cw(c-57.727,49.855) -55.206,50.272 cw(c-57.727,49.855) -55.195,50.202 ccw(c-54.944,50.236) -55.141,50.077 ccw(c-54.232,50.819) -55.061,49.988 cw(c-56.839,48.212) -54.645,49.438 ccw(c-54.423,49.562) -54.498,49.319 ccw(c-54.208,50.274) -54.208,49.276 -51.471,49.276 ccw(c-51.471,51.816) -49.675,50.02 -48.044,51.651 cw(c-46.248,49.855) -46.248,52.395 S230.2@-45.027,52.395 -45.027,48.612 cw(c-45.281,48.611) -45.051,48.504 ccw(c-42.487,47.315) -41.825,44.568 -31.643,44.568 cw(c-31.643,44.548) -31.623,44.548 cw(c-31.623,42.008) -29.083,42.008 -29.083,15.257 cw(c-31.623,15.257) -29.827,13.461 S258.1@-31.533,11.755 ; S202.2@-24.39,87.955 -37.725,87.955 ccw(c-37.725,85.415) -40.265,85.415 S216.2@-40.265,71.445 -45.528,71.445 ccw(c-45.528,68.905) -48.068,68.905 -48.068,64.262 cw(c-48.895,64.262) -49.52,63.72 ccw(c-49.712,63.554) -49.713,63.808 -53.765,63.808 ccw(c-53.765,62.528) -54.671,63.432 -54.814,63.289 cw(c-56.932,65.405) -56.932,62.411 -61.211,62.411 ccw(c-61.211,60.325) -63,61.397 ccw(c-61.211,60.325) -63.297,60.325 -63.297,57.785 -63.297,54.455 ccw(c-63.043,54.455) -63.157,54.228 cw(c-64.077,52.395) -62.692,53.907 cw(c-64.077,52.395) -62.691,53.906
col3: S203.2 S217.2 S231.2 S245.2 S260.1 U301.8 | length 138.5
  Component Side w0.254: S217.2@-52.965,68.905 -50.534,68.905 cw(c-50.534,66.365) -47.994,66.365 U301.8@-47.994,63.747 ccw(c-46.714,62.467) -48.524,62.467 U301.8@-48.524,61.732
  Bottom Layer w0.254: S260.1@-55.346,11.755 -50.742,11.755 ccw(c-50.742,14.295) -48.202,14.295 S245.2@-48.202,30.805 -48.202,32.102 cw(c-45.662,32.102) -45.662,34.642 -43.5,34.642 ccw(c-43.5,37.79) -41.903,35.078 ccw(c-43.5,37.79) -40.5,36.838 ccw(c-43.5,37.79) -40.636,39.096 ccw(c-43.5,37.79) -42.413,40.744 ccw(c-43.5,37.79) -43.5,40.938 -55.187,40.938 cw(c-55.187,43.478) -57.727,43.478 S231.2@-57.727,49.855 -60.242,49.855 cw(c-60.242,50.109) -60.349,49.879 ccw(c-61.537,47.315) -62.726,49.879 cw(c-62.833,50.109) -62.833,49.855 -64.262,49.855 cw(c-64.262,52.395) -66.802,52.395 -66.802,66.365 cw(c-64.262,66.365) -64.262,68.905 -58.071,68.905 ccw(c-58.071,69.159) -57.964,68.929 cw(c-56.775,66.365) -55.586,68.929 ccw(c-55.479,69.159) -55.479,68.905 S217.2@-52.965,68.905 -52.965,69.215 -44.184,77.996 ccw(c-45.98,79.792) -43.44,79.792 S203.2@-43.44,87.955
col4: S204.2 S218.2 S232.2 S246.2 | length 154
  Component Side w0.254: S232.2@-76.777,49.855 -76.777,51.452 cw(c-74.237,51.452) -74.237,53.992 -63.979,53.992 cw(c-63.979,52.633) -63.019,53.595 ; -63.018,53.594 -61.62,52.196 ccw(c-59.824,53.992) -59.824,51.452 -54.553,51.452 ccw(c-54.553,53.992) -52.757,52.196 -50.539,54.414 ccw(c-51.444,55.318) -50.165,55.318 -50.165,55.499 cw(c-49.32,55.499) -49.918,56.096 -49.797,56.217
  Bottom Layer w0.254: S246.2@-67.252,30.805 -67.252,32.556 cw(c-64.712,32.556) -64.712,35.096 -43.5,35.096 ccw(c-43.5,37.79) -43.5,40.484 -74.237,40.484 cw(c-74.237,43.024) -76.777,43.024 S232.2@-76.777,49.855 -76.777,59.838 cw(c-74.237,59.838) -76.034,61.634 -72.759,64.909 ccw(c-74.555,66.705) -72.015,66.705 S218.2@-72.015,68.905 -63.234,77.686 ccw(c-65.03,79.482) -62.49,79.482 S204.2@-62.49,87.955
col5: S205.2 S219.2 S233.2 S247.2 S261.2 S261_1.2 U301.22 | length 230.4
  Component Side w0.254: S233.2@-95.827,49.855 -95.827,51.906 cw(c-93.287,51.906) -93.287,54.446 -63.884,54.446 cw(c-63.884,52.811) -62.897,54.115 -61.432,52.65 ccw(c-59.636,54.446) -59.636,51.906 -55.231,51.906 ccw(c-55.231,54.446) -53.435,52.65 U301.22@-51.105,54.979 -50.737,55.347 ccw(c-51.016,55.626) -50.622,55.626 cw(c-49.48,55.626) -50.288,56.434 U301.22@-50.151,56.57
  Bottom Layer w0.254: S261.2@-95.033,14.295 -87.046,22.282 ccw(c-88.842,24.078) -86.302,24.078 S247.2@-86.302,30.805 -86.302,33.01 cw(c-83.762,33.01) -83.762,35.55 -43.5,35.55 ccw(c-43.5,37.79) -43.5,40.03 -93.287,40.03 cw(c-93.287,42.57) -95.827,42.57 S233.2@-95.827,49.855 -95.827,59.965 cw(c-93.287,59.965) -95.084,61.761 -91.809,65.036 ccw(c-93.605,66.832) -91.065,66.832 S219.2@-91.065,68.905 -82.284,77.686 ccw(c-84.08,79.482) -81.54,79.482 S205.2@-81.54,87.955
col6: S206.2 S220.2 S234.2 S248.2 U301.21 | length 266.9
  Component Side w0.254: S234.2@-114.877,49.855 -114.877,52.36 cw(c-112.337,52.36) -112.337,54.9 -63.805,54.9 cw(c-63.805,53.024) -62.613,54.473 -61.244,53.104 ccw(c-59.448,54.9) -59.448,52.36 -55.908,52.36 ccw(c-55.908,54.9) -54.112,53.104 U301.21@-51.671,55.545 cw(c-51.159,55.545) -51.521,55.907 U301.21@-50.504,56.924
  Bottom Layer w0.254: S248.2@-105.352,30.805 -105.352,33.464 cw(c-102.812,33.464) -102.812,36.004 -43.5,36.004 ccw(c-43.5,37.79) -43.5,39.576 -112.337,39.576 cw(c-112.337,42.116) -114.877,42.116 S234.2@-114.877,49.855 -114.877,59.203 cw(c-112.337,59.203) -114.134,60.999 -110.859,64.274 ccw(c-112.655,66.07) -110.115,66.07 S220.2@-110.115,68.905 -101.334,77.686 ccw(c-103.13,79.482) -100.59,79.482 S206.2@-100.59,87.955
col7: S207.2 S221.2 S235.2 S249.2 S261_1.@-123.449,17.47 S262.1 U301.20 | length 376.4
  Component Side w0.254: S262.1@-138.689,11.755 -138.689,8.582 ccw(c-136.149,8.582) -136.149,6.042 -124.553,6.042 ccw(c-124.553,8.582) -124.552,6.042 ccw(c-124.553,8.582) -122.013,8.582 S262.1@-122.013,11.755 ; S235.2@-133.927,49.855 -133.927,52.814 cw(c-131.387,52.814) -131.387,55.354 -63.706,55.354 cw(c-63.706,53.261) -62.369,54.871 -61.056,53.558 ccw(c-59.26,55.354) -59.26,52.814 -56.586,52.814 ccw(c-56.586,55.354) -54.789,53.558 U301.20@-52.237,56.111 ccw(c-52.237,56.623) -51.875,56.261 U301.20@-50.858,57.277 ; S262.1@-133.443,14.295 S262.1@-133.443,14.605
  Bottom Layer w0.254: S262.1@-138.689,11.755 cw(c-136.149,11.755) -136.149,14.295 -133.443,14.295 S262.1@-133.443,14.351 ; S262.1@-122.013,11.755 -123.658,13.4 cw(c-121.862,15.196) -124.402,15.196 S249.2@-124.402,30.805 -124.402,33.918 cw(c-121.862,33.918) -121.862,36.458 -43.5,36.458 ccw(c-43.5,37.79) -43.5,39.122 -131.387,39.122 cw(c-131.387,41.662) -133.927,41.662 S235.2@-133.927,49.855 -133.927,59.838 cw(c-131.387,59.838) -133.184,61.634 -129.909,64.909 ccw(c-131.705,66.705) -129.165,66.705 S221.2@-129.165,68.905 -120.384,77.686 ccw(c-122.18,79.482) -119.64,79.482 S207.2@-119.64,87.955
col8: S208.2 S222.2 S236.2 S250.2 U301.19 | length 344.1
  Component Side w0.254: S236.2@-152.977,49.855 -152.977,53.268 cw(c-150.437,53.268) -150.437,55.808 -63.618,55.808 cw(c-63.618,53.474) -62.118,55.262 -60.868,54.012 ccw(c-59.072,55.808) -59.072,53.268 -56.874,53.268 ccw(c-56.874,56.051) -54.908,54.082 ccw(c-56.874,56.051) -54.906,54.083 -53.711,55.279 ccw(c-54.185,55.753) -53.514,55.753 cw(c-53.003,55.753) -53.365,56.114 U301.19@-52.802,56.676 -52.602,56.877 cw(c-51.943,56.219) -51.943,57.15 ccw(c-51.943,57.755) -51.515,57.327 U301.19@-51.211,57.631
  Bottom Layer w0.254: S250.2@-143.452,30.805 -143.452,33.918 ccw(c-145.992,33.918) -145.992,36.458 -234.5,36.458 cw(c-234.5,37.79) -234.5,39.122 -155.517,39.122 ccw(c-155.517,41.662) -152.977,41.662 S236.2@-152.977,49.855 -148.959,53.874 ccw(c-150.755,55.67) -148.215,55.67 S222.2@-148.215,68.905 -139.434,77.686 ccw(c-141.23,79.482) -138.69,79.482 S208.2@-138.69,87.955
col9: S209.2 S223.2 S237.2 S251.2 S263.2 S263_1.2 S263_1.@-161.549,17.47 U301.18 | length 343.4
  Component Side w0.254: S237.2@-172.027,49.855 -172.027,53.722 cw(c-169.487,53.722) -169.487,56.262 -63.528,56.262 cw(c-63.528,53.722) -61.863,55.64 ; -61.859,55.645 -60.68,54.466 ccw(c-58.884,56.262) -58.884,53.722 -57.062,53.722 ccw(c-57.062,56.505) -55.096,54.536 ccw(c-57.062,56.505) -55.095,54.537 -54.391,55.241 ccw(c-55.411,56.261) -53.968,56.261 cw(c-53.048,56.261) -53.699,56.911 U301.18@-53.368,57.242 cw(c-52.364,56.238) -52.364,57.658 -52.197,57.658 ccw(c-52.197,58.396) -51.675,57.874 U301.18@-51.565,57.985
  Bottom Layer w0.254: S237.2@-172.027,49.855 -172.027,42.116 cw(c-174.567,42.116) -174.567,39.576 -234.5,39.576 ccw(c-234.5,37.79) -234.5,36.004 -165.042,36.004 cw(c-165.042,33.464) -162.502,33.464 S251.2@-162.502,30.805 -162.502,19.499 cw(c-165.042,19.499) -163.246,17.703 -166.471,14.478 S263.2@-166.471,14.295 ; S237.2@-172.027,50.165 -172.027,60.092 cw(c-169.487,60.092) -171.284,61.888 -168.009,65.163 ccw(c-169.805,66.959) -167.265,66.959 S223.2@-167.265,68.905 -158.484,77.686 ccw(c-160.28,79.482) -157.74,79.482 S209.2@-157.74,87.955
col10: CON305.1 S210.2 S224.2 S238.2 S252.2 U301.17 | length 308.4
  Component Side w0.254: S238.2@-191.077,49.855 -191.077,54.176 cw(c-188.537,54.176) -188.537,56.716 -62.983,56.716 cw(c-62.983,55.124) -61.857,56.25 -61.786,56.179 ccw(c-61.065,56.9) -61.609,56.037 ccw(c-61.065,56.9) -61.065,55.88 ccw(c-61.065,56.747) -60.589,56.022 cw(c-60.013,55.446) -60.456,56.13 cw(c-60.013,55.446) -60.013,56.261 CON305.1@-59.897,56.261 -59.897,55.78 ccw(c-58.293,55.78) -58.293,54.176 -57.25,54.176 ccw(c-57.25,56.959) -55.284,54.99 ccw(c-57.25,56.959) -55.283,54.991 -54.972,55.302 ccw(c-56.299,56.629) -54.422,56.629 cw(c-52.755,56.629) U301.17@-53.934,57.808 cw(c-52.653,56.527) -52.653,58.338 U301.17@-51.918,58.338
  Bottom Layer w0.254: S252.2@-181.552,30.805 -181.552,33.01 ccw(c-184.092,33.01) -184.092,35.55 -234.5,35.55 cw(c-234.5,37.79) -234.5,40.03 -193.617,40.03 ccw(c-193.617,42.57) -191.077,42.57 S238.2@-191.077,49.855 -191.077,59.711 cw(c-188.537,59.711) -190.334,61.507 -187.059,64.782 ccw(c-188.855,66.578) -186.315,66.578 S224.2@-186.315,68.905 -177.534,77.686 ccw(c-179.33,79.482) -176.79,79.482 S210.2@-176.79,87.955
col11: CON305.4 S211.2 S225.2 S239.2 S253.2 S264.2 U301.16 | length 307.9
  Component Side w0.254: S239.2@-210.127,49.855 -210.127,54.63 cw(c-207.587,54.63) -207.587,57.17 -65.014,57.17 ccw(c-65.014,60.618) -64.984,57.17 -64.094,57.178 -63.916,57.179 ccw(c-63.942,60.173) -62.597,57.499 ; -62.649,57.473 ccw(c-63.942,60.173) -62.597,57.499 ; -60.81,58.666 ccw(c-61.595,58.928) -60.768,58.9 ; CON305.4@-58.627,57.531 -58.627,59.497 -58.674,59.544 ; U301.16@-51.918,59.257 -52.653,59.257 cw(c-52.653,61.068) U301.16@-53.934,59.788 cw(c-54.522,60.376) -54.522,59.544 -58.674,59.544 ; -62.597,57.499 ccw(c-63.942,60.173) -61.85,58.031 cw(c-61.672,57.85) -61.654,58.103 ccw(c-61.595,58.928) -61.226,58.188 ccw(c-61.595,58.928) -60.768,58.9 ; -60.768,58.9 cw(c-60.515,58.891) -60.751,58.983 ; -60.768,58.9 cw(c-60.515,58.891) -60.768,58.901 cw(c-60.515,58.891) -60.751,58.983 ; -60.751,58.983 cw(c-59.933,58.666) -59.933,59.544 -58.674,59.544
  Bottom Layer w0.254: S264.2@-204.571,14.295 -204.571,21.834 cw(c-202.031,21.834) -203.827,23.63 -201.346,26.111 ccw(c-203.142,27.907) -200.602,27.907 S253.2@-200.602,30.805 -200.602,32.556 ccw(c-203.142,32.556) -203.142,35.096 -234.5,35.096 cw(c-234.5,37.79) -234.5,40.484 -212.667,40.484 ccw(c-212.667,43.024) -210.127,43.024 S239.2@-210.127,49.855 -210.127,59.584 cw(c-207.587,59.584) -209.384,61.38 -206.109,64.655 ccw(c-207.905,66.451) -205.365,66.451 S225.2@-205.365,68.905 -196.584,77.686 ccw(c-198.38,79.482) -195.84,79.482 S211.2@-195.84,87.955
col12: CON305.3 S212.2 S226.2 S240.2 S254.2 S265.2 U301.15 | length 299.3
  Component Side w0.254: S240.2@-229.177,49.855 -229.177,55.084 cw(c-226.637,55.084) -226.637,57.624 -65.014,57.624 ccw(c-65.014,60.618) -64.778,57.633 -63.942,57.633 ccw(c-63.942,60.173) -62.146,58.377 v1(-61.595,58.928) -60.846,59.677 cw(c-60.071,58.902) -60.071,59.998 -56.902,59.998 ccw(c-56.902,61.982) -55.5,60.578 -55.32,60.758 cw(c-54.526,59.964) -54.526,61.087 -54.483,61.087 cw(c-54.483,60.166) -53.832,60.817 U301.15@-53.368,60.353 ccw(c-52.555,61.167) -52.555,60.017 -52.324,60.017 cw(c-52.324,59.163) -51.721,59.767 U301.15@-51.565,59.611 ; v1(-58.674,55.118) -58.627,55.165 CON305.3@-58.627,56.261
  Bottom Layer w0.254: -235.419,40.801 cw(c-234.5,37.79) -235.269,40.842 ; S265.2@-226.002,14.295 -220.396,19.901 ccw(c-222.192,21.697) -219.652,21.697 S254.2@-219.652,30.805 -226.984,30.805 cw(c-226.984,33.345) -228.78,31.549 -231.293,34.062 ccw(c-233.089,32.266) -232.143,34.624 ccw(c-232.239,34.388) -232.24,34.642 -234.5,34.642 cw(c-234.5,37.79) -235.503,34.806 cw(c-234.5,37.79) -235.47,40.785 cw(c-234.5,37.79) -235.468,40.785 cw(c-234.5,37.79) -235.269,40.842 ; S212.2@-214.89,87.955 -214.89,85.247 cw(c-217.43,85.247) -215.634,83.451 -226.896,72.189 cw(c-228.692,73.985) -228.692,71.445 S226.2@-230.765,71.445 -230.765,65.701 ccw(c-228.225,65.701) -230.021,63.905 -229.743,63.627 cw(c-231.108,62.262) -229.177,62.262 S240.2@-229.177,49.855 -229.177,43.478 cw(c-231.717,43.478) -231.717,40.938 -234.5,40.938 ccw(c-234.5,37.79) -235.267,40.843 ccw(c-234.5,37.79) -235.269,40.842 ; v1(-61.595,58.928) ccw(c-61.595,58.185) -62.338,58.185 -62.338,57.34 ccw(c-60.116,57.34) -60.116,55.118 v1(-58.674,55.118)